# Altium PCB OK335xD V2.4 20160121.PcbDoc (part 3 of 4)
Units mm, origin at the board's own origin, x right, y up, seen from the top; angles counter-clockwise.
Board outline 190 x 130 mm, 4 copper layers (Top Layer, GND, POWER, Bottom Layer); 326 components, 332 nets, 1399 pads, 799 vias.
Unrouted connection lines stored in the file: 413.
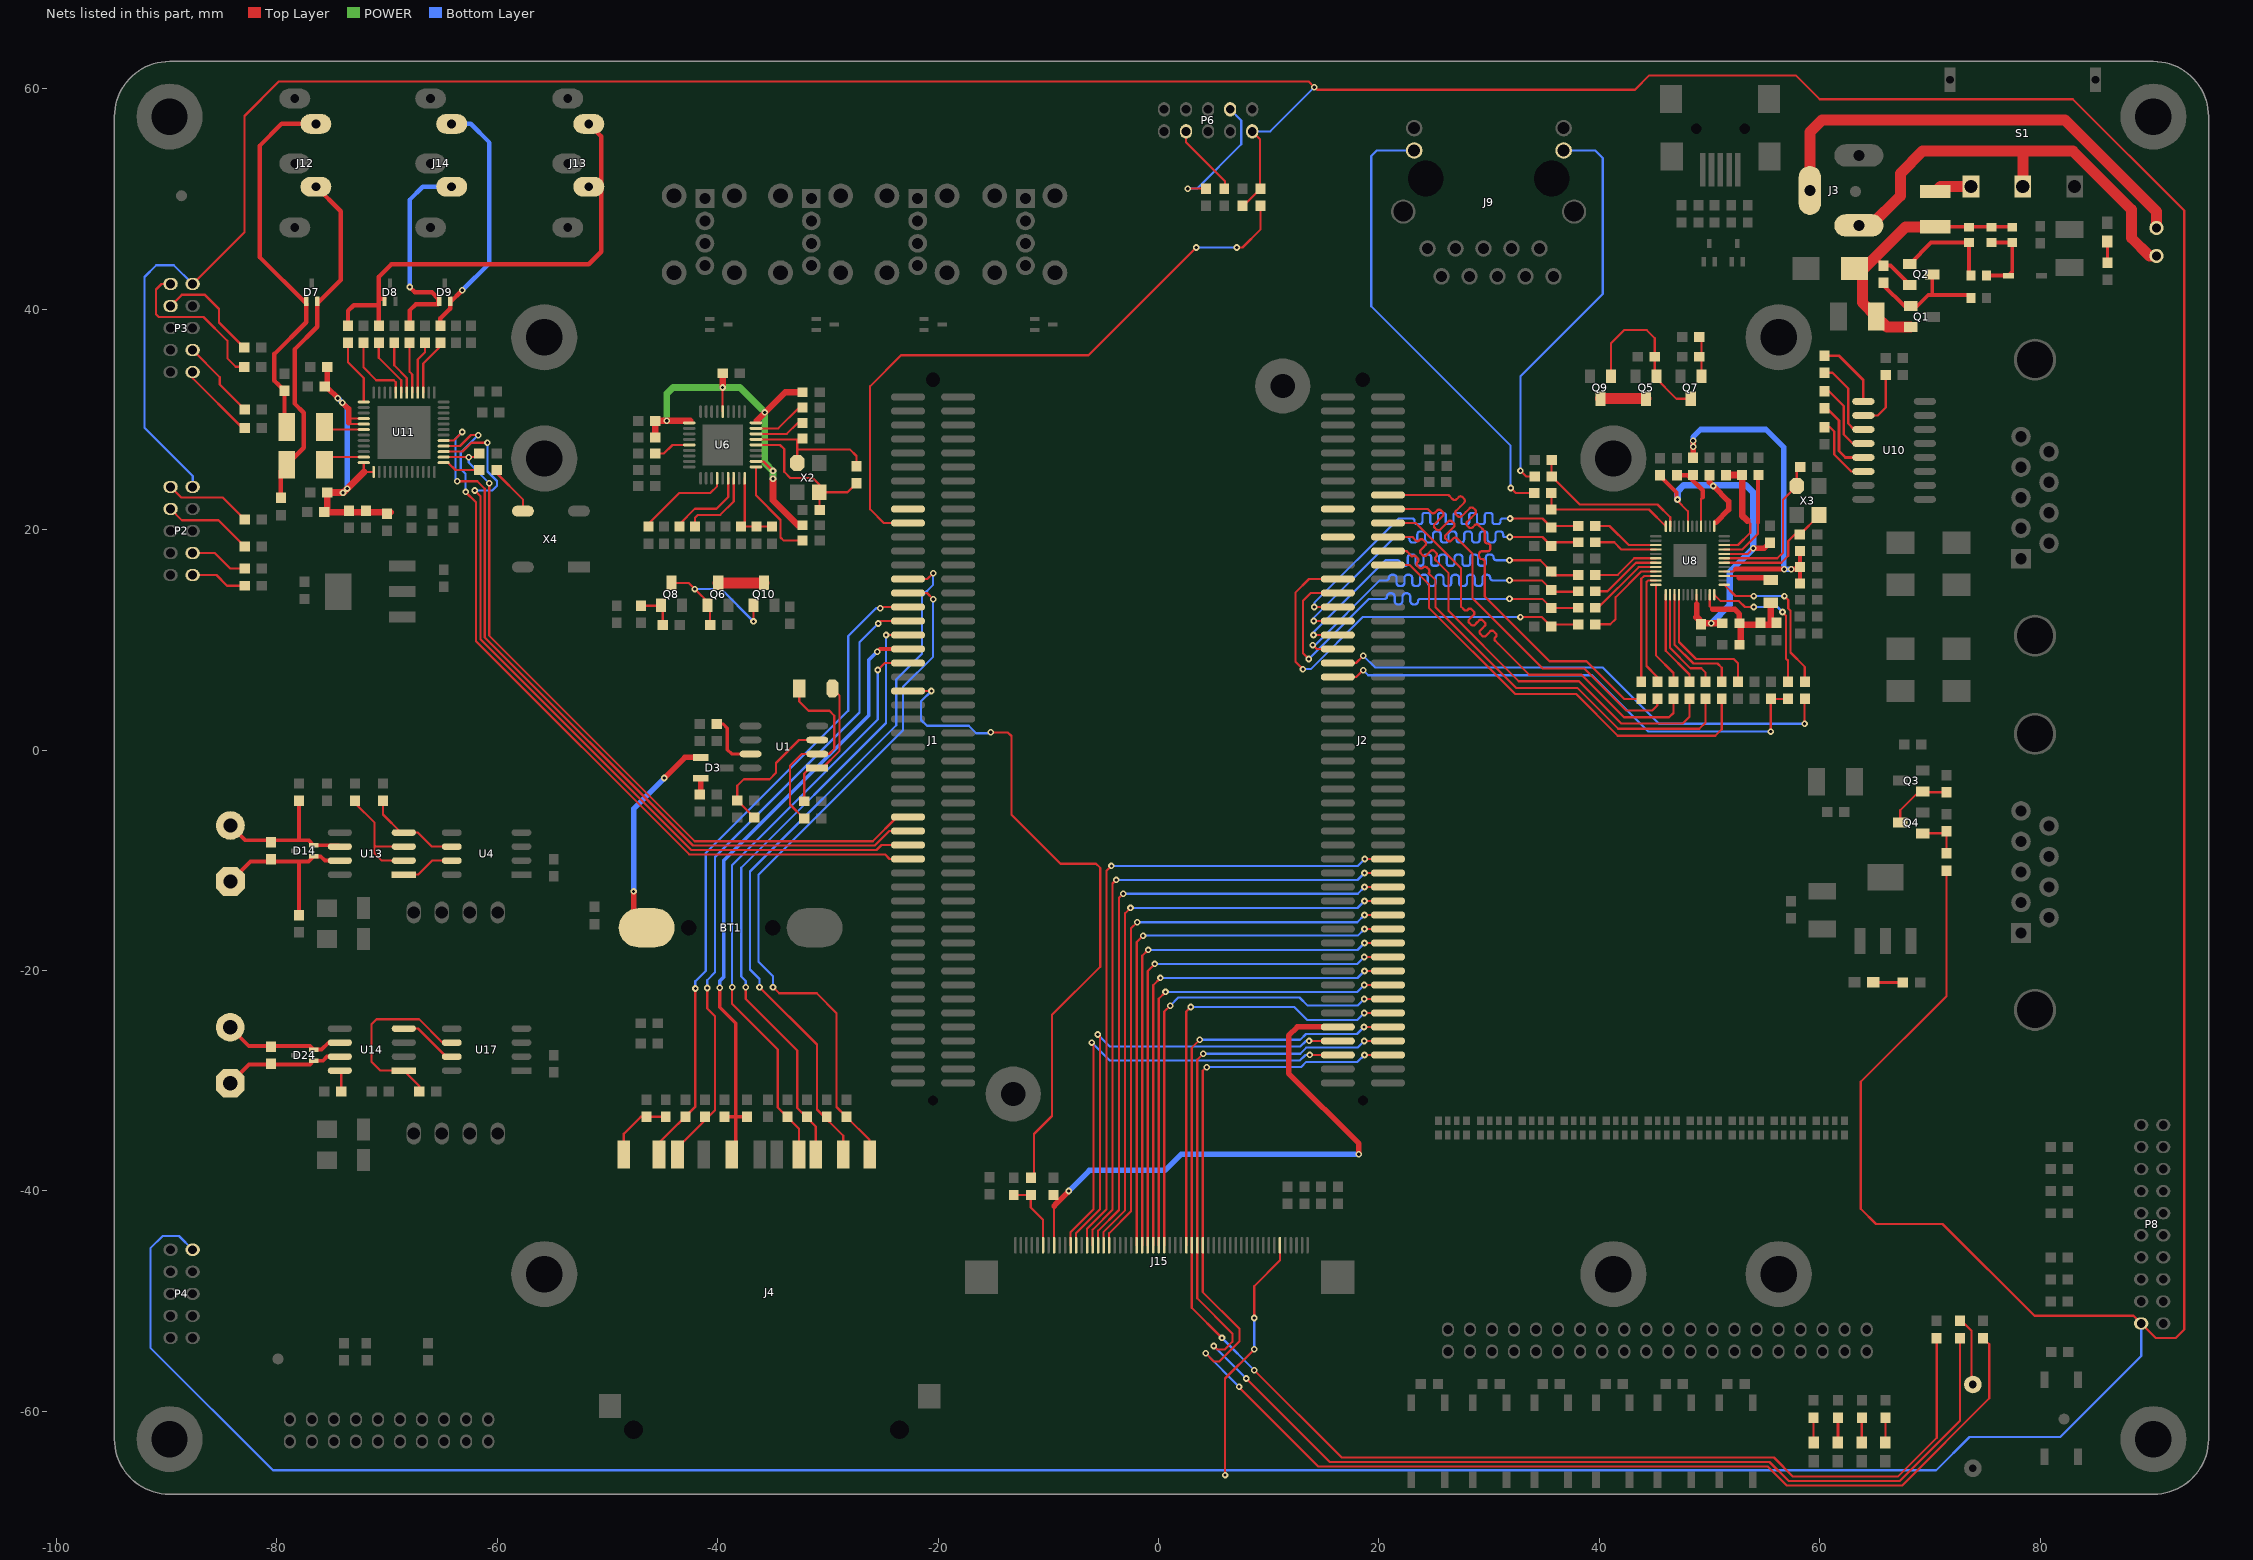
[diagram p5: the nets of this part, all layers, seen from the top]

## Via types
v1: diameter 0.6, hole 0.3, Top Layer to Bottom Layer, tented both sides, 718 vias
v2: diameter 0.66, hole 0.3, Top Layer to Bottom Layer, tented both sides, 34 vias
v3: diameter 0.6, hole 0.35, Top Layer to Bottom Layer, tented both sides, 25 vias
v4: diameter 0.45, hole 0.3, Top Layer to Bottom Layer, tented both sides, 16 vias
v5: diameter 0.4, hole 0.254, Top Layer to Bottom Layer, 4 vias
v6: diameter 0.6, hole 0.3, Top Layer to Bottom Layer, 2 vias

## Nets (pads, with @x,y where several pads share a name; then routed paths per layer and width w, separated by ;. In a path a pad name is that pad's centre, name@x,y a point inside that pad or via, vN(x,y) a via of type N, cw(c..) or ccw(c..) an arc to the next point about the centre after c; other vN are vias at no path point) (continued)
LCD_D1: J2.96 J15.20 R119.1 | length 132.5
  Top Layer w0.2: v1(4.293,-54.737) 5.029,-55.474 5.512,-55.474 7.366,-53.619 7.366,-52.527 4.025,-49.186 J15.20@4.025,-44.925 4.025,-29.097 v1@4.369,-28.753 ; v1(7.315,-57.76) 7.315,-57.81 14.503,-64.999 55.283,-64.999 57.01,-66.726 67.488,-66.726 75.387,-58.826 75.387,-53.912 R119.1@74.828,-53.353 ; v1(18.69,-27.665) J2.96@20.825,-27.665
  Bottom Layer w0.2: v1(4.293,-54.737) v1(7.315,-57.76) ; v1@4.369,-28.753 12.954,-28.753 13.411,-28.296 18.059,-28.296 v1(18.69,-27.665)
  other v1: 4.369,-28.778
LCD_D2: J2.94 J15.21 R116.1 | length 129.5
  Top Layer w0.2: v1(4.074,-27.549) 3.525,-28.098 J15.21@3.525,-44.925 3.525,-49.753 6.706,-52.934 6.706,-53.696 6.02,-54.381 5.334,-54.381 v1(5.029,-54.077) ; v1(7.976,-57.023) 15.551,-64.599 55.449,-64.599 57.176,-66.326 67.253,-66.326 72.72,-60.858 R116.1@72.72,-53.353 ; v1(18.673,-26.395) J2.94@20.825,-26.395
  Bottom Layer w0.2: v1(4.074,-27.549) 12.862,-27.549 13.411,-27 18.068,-27 v1(18.673,-26.395) ; v1(5.029,-54.077) v1(7.976,-57.023)
LCD_D3: J2.92 J15.22 R117.1 | length 126.6
  Top Layer w0.2: v1(3.759,-26.289) 3.025,-27.023 J15.22@3.025,-44.925 3.025,-50.599 v1(5.766,-53.34) ; v1(8.687,-56.261) 16.624,-64.199 55.842,-64.199 57.569,-65.926 67.087,-65.926 70.612,-62.401 R117.1@70.612,-53.353 ; v1(18.648,-25.125) J2.92@20.825,-25.125
  Bottom Layer w0.2: v1(3.759,-26.289) 12.852,-26.289 13.386,-25.756 18.017,-25.756 v1(18.648,-25.125) ; v1(5.766,-53.34) v1(8.687,-56.261)
LCD_D4: J2.90 J15.23 | length 40.4
  Top Layer w0.2: J15.23@2.525,-44.925 2.525,-23.725 v1(2.932,-23.317) ; v1(18.673,-23.855) J2.90@20.825,-23.855
  Bottom Layer w0.2: v1(2.932,-23.317) 12.319,-23.317 13.487,-24.486 18.043,-24.486 v1(18.673,-23.855)
LCD_D5: J2.88 J15.27 | length 42.6
  Top Layer w0.2: J15.27@0.525,-44.925 0.525,-23.732 v1(1.067,-23.19) ; v1(18.673,-22.585) J2.88@20.825,-22.585
  Bottom Layer w0.2: v1(1.067,-23.19) 1.803,-22.454 12.802,-22.454 13.538,-23.19 18.068,-23.19 v1(18.673,-22.585)
LCD_D6: J2.86 J15.28 | length 43.7
  Top Layer w0.2: J15.28@0.025,-44.925 0.025,-22.556 v1(0.635,-21.946) ; v1(18.673,-21.315) J2.86@20.825,-21.315
  Bottom Layer w0.2: v1(0.635,-21.946) 18.043,-21.946 v1(18.673,-21.315)
LCD_D7: J2.84 J15.29 | length 45.4
  Top Layer w0.2: J15.29@-0.475,-44.925 -0.475,-21.328 v1(0.178,-20.676) ; v1(18.69,-20.045) J2.84@20.825,-20.045
  Bottom Layer w0.2: v1(0.178,-20.676) 18.059,-20.676 v1(18.69,-20.045)
LCD_D8: J2.82 J15.30 | length 47.2
  Top Layer w0.2: J15.30@-0.975,-44.925 -0.975,-20.05 v1(-0.33,-19.406) ; v1(18.673,-18.775) J2.82@20.825,-18.775
  Bottom Layer w0.2: v1(-0.33,-19.406) 18.043,-19.406 v1(18.673,-18.775)
LCD_D9: J2.80 J15.31 | length 49
  Top Layer w0.2: J15.31@-1.475,-44.925 -1.475,-18.671 v1(-0.94,-18.136) ; v1(18.699,-17.505) J2.80@20.825,-17.505
  Bottom Layer w0.2: v1(-0.94,-18.136) 18.068,-18.136 v1(18.699,-17.505)
LCD_D10: J2.78 J15.32 | length 50.8
  Top Layer w0.2: J15.32@-1.975,-44.925 -1.975,-17.418 v1(-1.397,-16.84) ; v1(18.699,-16.235) J2.78@20.825,-16.235
  Bottom Layer w0.2: v1(-1.397,-16.84) 18.094,-16.84 v1(18.699,-16.235)
LCD_D11: J2.76 J15.37 | length 53.4
  Top Layer w0.2: J15.37@-4.475,-44.925 -4.475,-43.845 -2.489,-41.859 -2.489,-16.18 v1(-1.93,-15.621) ; v1(18.699,-14.965) J2.76@20.825,-14.965
  Bottom Layer w0.2: v1(-1.93,-15.621) 18.043,-15.621 v1(18.699,-14.965)
LCD_D12: J2.74 J15.38 | length 54.4
  Top Layer w0.2: -4.975,-44.12 -4.975,-43.718 -3.023,-41.765 -3.023,-14.808 v1(-2.54,-14.326) ; v1(18.699,-13.695) J2.74@20.825,-13.695
  Bottom Layer w0.2: v1(-2.54,-14.326) 18.068,-14.326 v1(18.699,-13.695)
LCD_D13: J2.72 J15.39 | length 57.1
  Top Layer w0.2: J15.39@-5.475,-44.925 -5.475,-43.624 -3.581,-41.73 -3.581,-13.411 v1(-3.2,-13.03) ; v1(18.699,-12.425) J2.72@20.825,-12.425
  Bottom Layer w0.2: v1(-3.2,-13.03) 18.094,-13.03 v1(18.699,-12.425)
LCD_D14: J2.70 J15.40 | length 58.9
  Top Layer w0.2: J15.40@-5.975,-44.925 -5.975,-43.53 -4.166,-41.72 -4.166,-12.116 v1(-3.835,-11.786) ; v1(18.699,-11.155) J2.70@20.825,-11.155
  Bottom Layer w0.2: v1(-3.835,-11.786) 18.068,-11.786 v1(18.699,-11.155)
LCD_D15: J2.68 J15.41 | length 60.7
  Top Layer w0.2: J15.41@-6.475,-44.925 -6.475,-43.436 -4.724,-41.685 -4.724,-10.973 v1(-4.267,-10.516) ; v1(18.715,-9.885) J2.68@20.825,-9.885
  Bottom Layer w0.2: v1(-4.267,-10.516) 18.085,-10.516 v1(18.715,-9.885)
LCD_ENBKL: J1.43 R140.1 | length 61.8
  Top Layer w0.2: J1.43@-22.725,5.358 v1(-20.6,5.358) ; v1(-15.215,1.6) -13.665,1.6 -13.335,1.27 -13.335,-5.873 -8.896,-10.312 -5.664,-10.312 -5.283,-10.693 -5.283,-19.66 -9.652,-24.028 -9.652,-33.198 -11.29,-34.835 R140.1@-11.29,-38.827
  Bottom Layer w0.2: v1(-20.6,5.358) -21.539,4.42 -21.539,2.73 -21.006,2.197 -17.209,2.197 -16.535,1.524 -15.291,1.524 v1(-15.215,1.6)
LCD_HSYNC: J2.93 J15.43 | length 42.5
  Top Layer w0.2: J15.43@-7.475,-44.925 -7.475,-43.842 -5.309,-41.676 -5.309,-26.01 v1(-5.512,-25.806) ; v1(13.666,-26.392) J2.93@16.275,-26.392
  Bottom Layer w0.2: v1(-5.512,-25.806) -4.42,-26.899 12.878,-26.899 13.385,-26.392 v1(13.666,-26.392)
LCD_PCLK: C4.2 J2.91 J15.47 | length 51.6
  Top Layer w0.2: J15.47@-9.475,-44.925 -9.475,-41.402 ; -9.474,-41.097 -9.22,-41.097
  Top Layer w0.5: -9.475,-41.402 -9.475,-41.352 -9.22,-41.097 v1(-8.128,-40.005) ; J2.91@16.275,-25.122 12.597,-25.122 11.811,-25.908 11.811,-29.337 18.186,-35.712 v1(18.186,-36.678)
  Bottom Layer w0.5: v1(-8.128,-40.005) -6.265,-38.142 0.582,-38.142 2.046,-36.678 v1(18.186,-36.678)
LCD_VSYNC: J2.95 J15.44 | length 42.5
  Top Layer w0.2: J15.44@-7.975,-44.925 -7.975,-43.748 -5.893,-41.666 -5.893,-26.695 v1(-6.045,-26.543) ; v1(13.74,-27.662) J2.95@16.275,-27.662
  Bottom Layer w0.2: v1(-6.045,-26.543) -4.42,-28.169 12.827,-28.169 13.334,-27.662 v1(13.74,-27.662)
MAX485-RXD: U4.7 U13.1 | length 4.9
  Top Layer w0.2: U13.1@-68.474,-11.303 -67.183,-11.303 -65.913,-10.033 U4.7@-64.122,-10.033
MAX485-TXD: R112.2 U4.6 U13.4 | length 8.7
  Top Layer w0.2: R112.2@-70.358,-4.585 -70.358,-5.842 -68.707,-7.493 U13.4@-68.474,-7.493 -67.183,-7.493 -65.913,-8.763 U4.6@-64.122,-8.763
MCASP0_ACLKR: J1.61 R97.1 U11.38 | length 67
  Top Layer w0.2: U11.38@-64.853,26.579 v1(-62.586,26.579) -61.953,26.579 R97.1@-61.608,26.924 ; v1(-60.706,24.206) -60.719,24.194 -60.719,10.38 -42.071,-8.268 -25.921,-8.268 -23.725,-6.072 J1.61@-22.725,-6.072
  Bottom Layer w0.2: v1(-62.586,26.579) -62.586,26.086 v1(-60.706,24.206)
MCASP0_AHCLKX: J1.63 U11.41 | length 69.8
  Top Layer w0.2: U11.41@-64.853,28.079 -63.945,28.079 v1(-63.17,28.854) ; v1(-63.627,24.384) -61.798,24.384 -61.119,23.704 -61.119,10.214 -42.237,-8.668 -25.755,-8.668 -24.429,-7.342 J1.63@-22.725,-7.342
  Bottom Layer w0.2: v1(-63.627,24.384) -63.779,24.536 -63.779,28.245 v1(-63.17,28.854)
MCASP0_AXR1: J1.67 U11.40 | length 70.8
  Top Layer w0.2: U11.40@-64.853,27.579 -63.378,27.579 -62.382,28.575 v1(-61.722,28.575) ; v1(-62.865,23.419) -61.919,22.472 -61.919,9.883 -42.568,-9.468 -24.817,-9.468 -24.403,-9.882 J1.67@-22.725,-9.882
  Bottom Layer w0.2: v1(-62.865,23.419) -62.865,25.07 -63.297,25.502 -63.297,27 v1(-61.722,28.575)
MCASP0_FSR: J1.65 U11.39 | length 71.4
  Top Layer w0.2: U11.39@-64.853,27.079 -63.142,27.079 -62.332,27.889 v1(-60.884,27.889) ; v1(-62.027,23.546) -61.519,23.038 -61.519,10.049 -42.402,-9.068 -25.589,-9.068 -25.133,-8.612 J1.65@-22.725,-8.612
  Bottom Layer w0.2: v1(-62.027,23.546) -60.452,23.546 -60.02,23.978 -60.02,24.409 -60.884,25.273 v1(-60.884,27.889)
MCP2551-RXD: U14.4 U17.7 | length 5.4
  Top Layer w0.2: U14.4@-68.474,-25.273 -67.183,-25.273 -64.643,-27.813 U17.7@-64.122,-27.813
MCP2551-TXD: R153.2 U14.1 U17.6 | length 17.5
  Top Layer w0.2: R153.2@-67.069,-30.988 -67.069,-30.488 U14.1@-68.474,-29.083 -70.612,-29.083 -71.399,-28.296 -71.399,-24.892 -70.942,-24.435 -67.081,-24.435 -64.973,-26.543 U17.6@-64.122,-26.543
MMC0_CD: J1.39 J4.11 R27.2 | length 55
  Top Layer w0.2: v1(-38.684,-21.514) -38.684,-23.038 -34.544,-27.178 -34.544,-32.436 -32.612,-34.368 J4.11@-32.612,-36.703 ; v1(-25.476,7.264) -24.842,7.898 J1.39@-22.725,7.898
  Bottom Layer w0.2: v1(-38.684,-21.514) -38.684,-10.439 -25.476,2.769 v1(-25.476,7.264)
MMC0_CLK: C14.1 J1.37 J4.5 R23.2 | length 56.9
  Top Layer w0.35: v1(-39.802,-21.565) -39.802,-23.343 -38.354,-24.79 J4.5@-38.354,-36.476 ; C14.1@-39.37,-33.274 R23.2@-37.592,-33.274 ; J4.5@-38.708,-36.703 J4.5@-38.481,-36.476 ; v1(-25.527,8.915) -25.274,9.168 J1.37@-22.725,9.168
  Bottom Layer w0.35: v1(-39.802,-21.565) -39.802,-20.955 -39.446,-20.599 -39.446,-10.024 -26.289,3.133 -26.289,8.153 v1(-25.527,8.915)
MMC0_CMD: J1.35 J4.2 R22.2 | length 57.4
  Top Layer w0.2: v1(-37.44,-21.514) -37.44,-22.581 -32.766,-27.254 -32.766,-32.487 -31.088,-34.165 J4.2@-31.088,-36.703 ; v1(-24.714,10.439) -24.713,10.438 J1.35@-22.725,10.438
  Bottom Layer w0.2: v1(-37.44,-21.514) -37.44,-20.955 -37.846,-20.549 -37.846,-10.687 -24.714,2.445 v1(-24.714,10.439)
MMC0_D0: J1.33 J4.7 R24.2 | length 59.1
  Top Layer w0.2: J4.7@-43.638,-36.704 -43.638,-36.095 -40.234,-32.69 -40.234,-24.155 -40.945,-23.444 v1(-40.945,-21.59) ; v1(-25.425,11.481) -25.198,11.708 J1.33@-22.725,11.708
  Bottom Layer w0.2: v1(-40.945,-21.59) -40.945,-20.879 -40.234,-20.168 -40.234,-9.698 -27.127,3.409 -27.127,9.779 v1(-25.425,11.481)
MMC0_D1: J1.31 J4.8 R25.2 | length 60.7
  Top Layer w0.22: J4.8@-45.312,-36.703 -45.312,-35.635 -42.012,-32.334 -42.012,-23.969 v1(-42.012,-21.641) ; v1(-25.248,12.878) -25.147,12.978 J1.31@-22.725,12.978
  Bottom Layer w0.22: v1(-42.012,-21.641) -42.012,-20.98 -41.072,-20.041 -41.072,-9.35 -28.143,3.578 -28.143,10.338 -25.603,12.878 v1(-25.248,12.878)
MMC0_D2: J1.29 J4.9 R20.2 | length 65.6
  Top Layer w0.2: v1(-34.976,-21.514) -34.417,-22.073 -31.013,-22.073 -29.21,-23.876 -29.21,-32.385 R20.2@-28.321,-33.274 -26.208,-35.387 J4.9@-26.208,-36.703 ; J1.29@-22.725,14.248 -21.005,14.248 v1(-20.447,13.691)
  Bottom Layer w0.2: v1(-34.976,-21.514) -34.976,-20.523 -36.297,-19.202 -36.297,-11.328 -23.19,1.778 -23.19,5.715 -20.447,8.458 v1(-20.447,13.691)
MMC0_D3: J1.27 J4.1 R21.2 | length 65.6
  Top Layer w0.2: v1(-36.195,-21.514) -30.988,-26.721 -30.988,-32.614 -28.598,-35.004 J4.1@-28.598,-36.703 ; J1.27@-22.725,15.518 -20.981,15.518 v1(-20.447,16.053)
  Bottom Layer w0.2: v1(-36.195,-21.514) -36.195,-20.777 -37.059,-19.914 -37.059,-11.013 -23.8,2.246 -23.8,6.401 -21.463,8.738 -21.463,13.97 -20.447,14.986 v1(-20.447,16.053)
NetBT1_1: BT1.1 D3.1 | length 19.3
  Top Layer w0.5: v1(-47.625,-12.827) -47.625,-14.935 BT1.1@-46.431,-16.129 ; v1(-44.831,-2.54) -42.967,-0.676 D3.1@-41.536,-0.676
  Bottom Layer w0.5: v1(-47.625,-12.827) -47.625,-5.334 v1(-44.831,-2.54)
NetC8_1: C8.1 C21.1 D5.2 F1.2 Q1.2 Q2.2 R15.1 R16.1 R33.1 | length 27.7
  Top Layer w0.35: 65.024,44.704 65.773,43.955 C8.1@65.786,43.955 66.421,43.955 Q2.2@68.174,42.202 ; F1.2@70.485,47.473 77.433,47.473 R16.1@77.47,47.436
  Top Layer w1: Q1.2@68.25,38.367 66.1,38.367 C21.1@65.122,39.345 63.881,40.586 63.881,43.561 65.024,44.704 67.793,47.473 F1.2@70.485,47.473
NetC8_2: C8.2 Q1.1 Q2.3 R58.1 | length 11.2
  Top Layer w0.35: C8.2@65.786,42.405 65.786,42.164 67.678,40.272 Q1.1@68.25,40.272 68.847,40.272 69.85,41.275 73.468,41.275 R58.1@73.722,41.021 ; 70.206,41.377 Q2.3@70.206,43.142
NetC17_1: C17.1 R37.1 R42.2 U6.27 | length 6.8
  Top Layer w0.2: C17.1@-37.871,20.282 R37.1@-36.474,20.282 R42.2@-35.077,20.282 ; C17.1@-37.542,20.611 U6.27@-37.542,24.659
NetC19_2: C19.2 R62.2 U6.33 X2.1 | length 12.8
  Top Layer w0.2: U6.33@-36.517,28.184 C19.2@-32.382,28.184 ; X2.1@-32.775,26.039 -32.775,27.28 ; -32.775,28.127 -32.775,27.28 ; R62.2@-27.407,25.743 -27.407,26.67 -28.016,27.28 -32.775,27.28
NetC20_2: C20.2 R62.1 U6.32 X2.3 | length 14.4
  Top Layer w0.2: U6.32@-36.517,27.684 -34.339,27.684 -33.96,27.305 -33.96,25.248 -33.401,24.689 -31.369,24.689 -30.746,24.066 X2.3@-30.746,23.389 ; X2.3@-30.775,23.389 X2.3@-30.746,23.389 ; C20.2@-30.746,21.793 X2.3@-30.746,23.389 ; R62.1@-27.407,24.193 -28.211,23.389 X2.3@-30.746,23.389
NetC27_1: C27.1 U6.34 | length 4.6
  Top Layer w0.2: U6.34@-36.517,28.684 -33.724,28.684 -32.741,29.667 C27.1@-32.296,29.667
NetC29_1: C29.1 U6.14 | length 3.4
  Top Layer w0.2: C29.1@-45.656,26.899 -44.882,26.899 -44.096,27.684 U6.14@-42.567,27.684
NetC30_1: C30.1 C31.1 C32.1 C33.1 L14.2 U6.5 U6.10 U6.29 U6.36 | length 39.5
  Top Layer w0.2: v1(-39.548,32.893) -39.542,32.888 U6.5@-39.542,30.709 ; U6.29@-36.517,26.184 -35.836,26.184 v1(-34.976,25.324)
  Top Layer w0.6: L14.2@-45.656,28.372 C30.1@-45.656,29.87 v1(-44.628,29.87) -42.494,29.87 ; v1(-39.548,32.893) C31.1@-39.548,33.998 ; -36.449,29.87 -33.858,32.461 C32.1@-32.296,32.461 ; v1(-34.976,24.613) -34.976,22.657 -32.715,20.396 C33.1@-32.296,20.396
  POWER w0.6: v1(-44.628,29.87) -44.628,32.309 -44.044,32.893 v1(-39.548,32.893) -37.973,32.893 v1(-35.712,30.632) -35.712,26.034 -34.976,25.297 v1(-34.976,24.613)
NetC34_2: C34.2 C35.2 C36.2 L5.2 L6.1 U8.47 | length 11.4
  Top Layer w0.2: U8.47@50.025,14.097 50.025,13.043 50.292,12.776
  Top Layer w0.5: 50.292,12.776 52.273,12.776 52.718,12.331 L6.1@52.718,11.506
  Top Layer w0.6: C36.2@52.843,9.55 52.843,11.381 55.55,11.381 L5.2@55.55,13.377
NetC37_2: C37.2 U8.7 X3.1 | length 14
  Top Layer w0.2: U8.7@51.336,17.396 56.156,17.396 56.667,17.907 56.667,22.707 X3.1@57.916,23.956 57.916,25.366 C37.2@58.229,25.679
NetC38_2: C38.2 U8.6 X3.3 | length 11.2
  Top Layer w0.2: U8.6@51.336,16.996 56.518,16.996 57.15,17.628 57.15,18.974 57.734,19.558 C38.2@58.204,19.558 59.916,21.27 X3.3@59.916,21.306
NetC39_2: C39.2 C40.2 C41.2 C42.2 L6.2 U8.8 U8.13 U8.19 U8.44 | length 42.3
  Top Layer w0.2: 47.015,23.139 47.015,22.682 48.035,21.663 U8.19@48.035,20.297 ; 48.825,13.239 U8.44@48.825,14.097 ; U8.8@51.336,17.796 53.457,17.796 v1(53.975,18.313)
  Top Layer w0.35: C41.2@45.516,24.943 45.516,24.868 47.015,23.368 v1@47.015,22.733
  Top Layer w0.5: 48.819,12.065 48.819,13.233 48.825,13.239 ; C40.2@49.986,24.949 49.986,24.309 v1(50.343,23.952) 51.74,22.555 51.74,21.805 50.585,20.65 ; v1(53.975,18.313) 54.979,18.313 C42.2@55.474,18.808
  Top Layer w0.6: 48.819,12.065 49.378,11.506 v1(50.165,11.506) L6.2@51.168,11.506
  Bottom Layer w0.6: v1(47.092,22.733) 47.092,23.47 47.655,24.033 53.285,24.033 53.975,23.343 v1(53.975,18.313) 51.841,16.18 51.841,13.183 v1(50.165,11.506)
NetC43_2: C43.2 C44.2 L7.2 R86.1 U8.4 | length 31.9
  Top Layer w0.2: U8.4@51.336,16.196 52.137,16.196 52.349,16.408
  Top Layer w0.4: R86.1@58.21,15.116 C43.2@58.21,16.597 C44.2@58.21,18.078
  Top Layer w0.45: 52.349,16.408 v1(56.769,16.408) ; v1(57.404,16.408) C43.2@58.021,16.408
  Top Layer w0.5: 48.514,27.026 v1(48.514,27.508) v3(48.514,28.067)
  Bottom Layer w0.5: v1(48.514,27.508) 48.514,28.397 49.2,29.083 55.118,29.083 56.744,27.457 56.744,16.408 v1(56.769,16.408) v1(57.404,16.408)
NetC45_2: C45.2 L7.1 U8.16 | length 6.2
  Top Layer w0.2: U8.16@49.235,20.297 49.235,22.793 49.378,22.936
  Top Layer w0.4: C45.2@47.041,24.943 48.006,24.943 49.378,23.571 49.378,22.936
NetC47_2: C47.2 R87.2 U8.10 | length 9.8
  Top Layer w0.2: U8.10@51.336,18.596 52.581,18.596 53.696,19.71 53.696,20.549 53.416,20.828
  Top Layer w0.6: C47.2@51.486,24.949 51.492,24.955 R87.2@52.959,24.955 52.959,21.285 53.416,20.828
NetC49_2: C49.2 U10.2 | length 5.3
  Top Layer w0.2: U10.2@63.956,30.36 65.259,30.36 65.981,31.082 C49.2@65.981,34.03
NetC51_1: C51.1 U10.6 | length 6.4
  Top Layer w0.2: C51.1@60.431,29.301 60.92,29.301 61.322,28.898 61.322,26.816 62.858,25.28 U10.6@63.956,25.28
NetC52_1: C52.1 U10.4 | length 7
  Top Layer w0.2: C52.1@60.431,32.551 60.845,32.551 62.179,31.217 62.179,28.638 62.997,27.82 U10.4@63.956,27.82
NetC52_2: C52.2 U10.5 | length 7
  Top Layer w0.25: C52.2@60.431,31.001 60.642,31.001 61.747,29.896 61.747,27.127 62.325,26.55 U10.5@63.956,26.55
NetC53_1: C53.1 U11.23 | length 3.9
  Top Layer w0.2: C53.1@-75.67,25.883 -74.974,26.579 U11.23@-72.103,26.579
NetC53_2: C53.2 D7.2 J12.3 R101.2 | length 32.1
  Top Layer w0.4: R101.2@-79.629,22.873 -79.629,25.353 C53.2@-79.099,25.883 -77.546,27.436 -77.546,30.607 -78.384,31.445 -78.384,36.347 -76.335,38.397 -76.335,40.505 -74.193,42.647 -74.193,48.883 J12.3@-76.449,51.138
NetC54_1: C54.1 U11.18 | length 3.7
  Top Layer w0.2: C54.1@-75.67,29.312 -75.437,29.079 U11.18@-72.103,29.079
NetC54_2: C54.2 D7.1 J12.2 R102.2 | length 34.9
  Top Layer w0.4: C54.2@-79.099,29.312 -79.099,29.849 -79.299,30.048 R102.2@-79.299,32.601 -79.924,33.226 -79.935,33.226 -80.199,33.489 -80.199,33.501 -80.213,33.515 -80.213,35.941 -77.335,38.819 -77.335,40.505 -81.559,44.729 -81.559,54.813 -79.534,56.838 J12.2@-76.449,56.838
NetC55_1: C55.1 U11.7 | length 5.4
  Top Layer w0.2: C55.1@-70.739,36.944 -70.739,35.585 -68.703,33.549 U11.7@-68.703,32.429
NetC55_2: C55.2 D8.1 J13.2 J13.3 R103.1 | length 42.5
  Top Layer w0.4: R103.1@-73.533,38.494 -73.533,39.853 -73.025,40.361 -70.739,40.361 ; C55.2@-70.739,38.494 -70.739,40.361 ; -70.727,40.958 D8.1@-70.223,40.958 ; J13.2@-51.684,56.813 -50.546,55.675 -50.546,45.212 -51.689,44.069 -69.596,44.069 -70.739,42.926 -70.739,40.361
NetC56_1: C56.1 U11.8 | length 6.7
  Top Layer w0.2: C56.1@-72.136,36.944 -72.136,34.722 -70.968,33.553 -69.393,33.553 -69.203,33.364 U11.8@-69.203,32.429
NetC57_1: C57.1 U11.3 | length 5.2
  Top Layer w0.2: U11.3@-66.703,32.429 -66.703,35.075 -65.151,36.627 C57.1@-65.151,36.944
NetC57_2: C57.2 D9.2 J14.2 | length 22.2
  Top Layer w0.4: C57.2@-65.151,38.494 -65.151,39.167 -64.27,40.048 -64.27,40.607 v1(-63.157,41.72)
  Bottom Layer w0.4: J14.2@-63.749,56.813 -62.401,56.813 -60.706,55.118 -60.706,44.171 v1(-63.157,41.72)
NetC58_1: C58.1 U11.4 | length 4.8
  Top Layer w0.2: U11.4@-67.203,32.429 -67.203,35.438 -66.548,36.093 C58.1@-66.548,36.944
NetC59_1: C59.1 U11.5 | length 4.6
  Top Layer w0.2: C59.1@-67.945,36.944 -67.945,34.315 -67.703,34.073 U11.5@-67.703,32.429
NetC59_2: C59.2 D9.1 J14.3 | length 20.4
  Top Layer w0.4: C59.2@-67.945,38.494 -67.945,39.878 -67.374,40.449 -65.342,40.449 -65.342,40.958 -65.913,41.529 -67.462,41.529 v1(-67.945,42.012)
  Bottom Layer w0.4: v1(-67.945,42.012) -67.945,49.911 -66.743,51.113 J14.3@-63.749,51.113
NetC60_1: C60.1 U11.6 | length 5
  Top Layer w0.2: C60.1@-69.342,36.944 -69.342,34.9 -68.203,33.761 U11.6@-68.203,32.429
NetC61_1: C61.1 C62.1 C63.1 C64.1 C65.1 C66.1 L8.1 U11.16 U11.17 U11.24 U11.25 | length 30.7
  Top Layer w0.2: -73.482,29.579 U11.17@-72.103,29.579 ; -73.482,30.079 U11.16@-72.103,30.079 ; -72.103,25.229 U11.24@-72.103,26.079 ; -72.085,25.229 U11.25@-71.203,25.229
  Top Layer w0.5: C62.1@-75.4,34.773 -75.4,32.866 v1(-74.462,31.928) ; v1(-74.041,31.507) -73.482,30.948 -73.482,30.079 -73.482,29.69
  Top Layer w0.6: C63.1@-75.554,21.576 C65.1@-69.672,21.576 ; C63.1@-75.554,21.59 -75.425,21.719 C64.1@-75.425,23.368 -73.946,23.368 -72.085,25.229
  Bottom Layer w0.5: v1(-74.462,31.928) v1(-74.041,31.507) -73.609,31.075 v1(-73.609,23.724) v1(-73.99,23.343)
NetC75_1: C75.1 U10.1 | length 6.4
  Top Layer w0.25: C75.1@60.427,35.776 61.734,35.776 63.956,33.554 U10.1@63.956,31.63
NetC75_2: C75.2 U10.3 | length 7.5
  Top Layer w0.2: C75.2@60.427,34.226 61.151,34.226 62.579,32.798 62.579,29.623 63.112,29.09 U10.3@63.956,29.09
NetC76_2: C76.2 U1.2 X1.2 | length 17.9
  Top Layer w0.2: X1.2@-32.59,5.588 -32.59,4.396 -31.75,3.556 -29.845,3.556 -29.413,3.124 -29.413,0.127 -29.896,-0.356 -32.36,-0.356 -33.426,-1.422 -33.426,-4.941 C76.2@-32.144,-6.223
NetC77_2: C77.2 U1.1 X1.1 | length 12.5
  Top Layer w0.2: C77.2@-32.144,-4.648 -32.144,-2.121 -31.648,-1.626 -30.48,-1.626 -28.931,-0.076 -28.931,4.929 X1.1@-29.59,5.588
NetD3_2: D3.2 R8.1 | length 1.4
  Top Layer w0.5: R8.1@-41.536,-3.956 D3.2@-41.536,-2.576
NetD6_2: D6.2 R15.2 R16.2 R47.1 | length 7
  Top Layer w0.35: R47.1@75.122,43.053 D6.2@77.113,43.053 77.47,43.41 R16.2@77.47,46.036 R15.2@75.565,46.036
NetD14_1: D14.1 P5.1 R34.2 R39.2 U13.7 | length 15.9
  Top Layer w0.35: P5.1@-84.201,-11.923 -82.387,-10.109 -77.978,-10.109 ; R34.2@-77.978,-14.973 -77.978,-10.109 ; U13.7@-74.274,-10.033 -75.616,-10.033 -76.005,-9.644 D14.1@-76.645,-9.644 -77.11,-10.109 -77.978,-10.109
NetD14_2: D14.2 P5.2 R39.1 R105.2 U13.6 | length 14.3
  Top Layer w0.35: P5.2@-84.201,-6.843 -82.866,-8.179 -77.11,-8.179 D14.2@-76.645,-8.644 -74.393,-8.644 U13.6@-74.274,-8.763 ; -77.978,-8.153 R105.2@-77.978,-4.585
NetD24_1: D24.1 P7.1 R50.1 U14.7 | length 11
  Top Layer w0.35: P7.1@-84.226,-30.237 -82.514,-28.524 -76.983,-28.524 D24.1@-76.645,-28.186 -75.811,-28.186 -75.438,-27.813 U14.7@-74.274,-27.813
NetD24_2: D24.2 P7.2 R50.2 U14.6 | length 11.1
  Top Layer w0.35: P7.2@-84.226,-25.157 -82.535,-26.848 -76.983,-26.848 D24.2@-76.645,-27.186 -75.929,-27.186 -75.286,-26.543 U14.6@-74.274,-26.543
NetF1_1: F1.1 S1.3 | length 3.4
  Top Layer w1: F1.1@70.485,50.673 70.937,51.125 S1.3@73.725,51.125
NetJ1_19: J1.19 R261.2 | length 58.6
  Top Layer w0.2: J1.19@-22.725,20.598 -24.916,20.598 -26.162,21.844 -26.162,33.02 -23.368,35.814 -6.35,35.814 v1(3.429,45.593) ; v1(7.112,45.593) 7.62,45.593 9.271,47.244 R261.2@9.271,49.39
  Bottom Layer w0.2: v1(3.429,45.593) v1(7.112,45.593)
NetJ3_1: J3.1 P10.1 S1.2 | length 39.6
  Top Layer w1: J3.1@63.55,47.6 64.618,47.6 67.31,50.292 67.31,52.324 69.342,54.356 82.956,54.356 88.265,49.047 88.265,46.482 89.916,44.831 P10.1@90.551,44.831 ; S1.2@78.425,51.125 78.425,54.295
NetJ3_3: J3.3 P10.2 | length 42.1
  Top Layer w1: J3.3@59.105,50.775 59.105,56.057 60.198,57.15 82.245,57.15 90.551,48.844 P10.2@90.551,47.371
NetJ4_10: J4.10 R26.2 R30.1 | length 6.3
  Top Layer w0.22: J4.10@-48.514,-36.703 -48.514,-34.823 -46.965,-33.274 R26.2@-44.704,-33.274
NetJ9_D1: J9.D1 R82.2 | length 36.8
  Top Layer w0.2: v1(32.842,25.349) 33.376,24.816 R82.2@34.125,24.816
  Bottom Layer w0.2: v1(32.842,25.349) 32.842,33.909 40.31,41.377 40.31,53.721 39.634,54.397 J9.D1@36.76,54.397
NetJ9_D3: J9.D3 R83.2 | length 41.8
  Top Layer w0.2: v1(31.953,23.774) 32.41,23.317 R83.2@34.099,23.317
  Bottom Layer w0.2: J9.D3@23.2,54.397 19.802,54.397 19.304,53.899 19.304,40.259 31.953,27.61 v1(31.953,23.774)
NetJ15_49: J15.49 R140.2 R141.2 | length 6.4
  Top Layer w0.2: R141.2@-12.965,-40.377 -11.582,-40.377 -11.582,-41.504 -10.475,-42.611 J15.49@-10.475,-44.925
NetL5_1: L5.1 U8.3 | length 4.4
  Top Layer w0.2: U8.3@51.336,15.796 52.505,15.796 52.68,15.621
  Top Layer w0.5: 52.68,15.621 55.356,15.621 L5.1@55.55,15.427
NetLED1_1: LED1.1 R3.1 | length 1.9
  Top Layer w0.3: R3.1@86.106,44.209 LED1.1@86.106,46.14
NetLED2_1: LED2.1 R14.1 | length 2.7
  Top Layer w0.25: LED2.1@64.858,-21.082 R14.1@67.551,-21.082
NetLED4_2: LED4.2 R135.1 | length 2.3
  Top Layer w0.2: LED4.2@59.43,-62.821 R135.1@59.43,-60.562
NetLED5_2: LED5.2 R136.1 | length 2.3
  Top Layer w0.25: LED5.2@61.648,-62.826 R136.1@61.648,-60.562
NetLED6_2: LED6.2 R137.1 | length 2.3
  Top Layer w0.2: LED6.2@63.816,-62.818 R137.1@63.816,-60.562
NetLED7_2: LED7.2 R138.1 | length 2.3
  Top Layer w0.2: LED7.2@65.958,-62.822 R138.1@65.958,-60.562
NetP2_1: P2.1 R28.1 | length 5.1
  Top Layer w0.2: P2.1@-87.63,15.875 -85.471,15.875 -84.506,14.91 R28.1@-82.893,14.91
NetP2_3: P2.3 R49.1 | length 5.3
  Top Layer w0.2: P2.3@-87.63,17.875 -85.617,17.875 -84.201,16.459 R49.1@-82.893,16.459
NetP2_8: P2.8 R79.2 | length 8.1
  Top Layer w0.2: P2.8@-89.63,21.875 -88.609,20.853 -85.281,20.853 R79.2@-82.893,18.466
NetP2_10: P2.10 R84.2 | length 7.9
  Top Layer w0.2: P2.10@-89.63,23.875 -88.666,22.911 -84.9,22.911 R84.2@-82.919,20.93
NetP3_1: P3.1 R156.1 | length 7.1
  Top Layer w0.2: P3.1@-87.63,34.29 -87.63,33.731 -83.109,29.21 R156.1@-82.919,29.21
NetP3_3: P3.3 R157.1 | length 7.3
  Top Layer w0.2: P3.3@-87.63,36.29 -85.166,33.826 -85.166,33.159 R157.1@-82.919,30.912
NetP3_8: P3.8 R143.2 | length 9.8
  Top Layer w0.22: P3.8@-89.63,40.29 -88.62,41.3 -86.512,41.3 -85.242,40.03 -85.242,38.798 R143.2@-82.969,36.525
NetP3_10: P3.10 R142.2 | length 14.7
  Top Layer w0.2: P3.10@-89.63,42.29 -90.451,42.29 -90.957,41.783 -90.957,39.548 -90.703,39.294 -86.639,39.294 -84.48,37.135 -84.48,35.535 -83.718,34.773 R142.2@-82.944,34.773
NetP6_3: P6.3 R147.2 | length 6.7
  Top Layer w0.2: P6.3@2.508,56.134 2.508,55.15 6.045,51.613 R147.2@6.045,50.94
NetP6_8: P6.8 R148.1 | length 11.8
  Top Layer w0.2: v1(2.654,50.94) R148.1@4.318,50.94
  Bottom Layer w0.2: v1(2.654,50.94) 3.493,50.94 7.518,54.966 7.518,57.124 P6.8@6.508,58.134
NetQ2_1: Q2.1 R33.2 R47.2 | length 9.2
  Top Layer w0.35: Q2.1@68.174,44.107 70.102,46.036 R33.2@73.533,46.036 73.533,43.242 R47.2@73.722,43.053
NetQ3_1: Q3.1 Q4.3 R59.1 | length 6
  Top Layer w0.2: Q4.3@67.31,-6.591 67.31,-5.461 68.948,-3.823 R59.1@71.501,-3.823
NetQ4_1: Q4.1 R61.1 R106.1 | length 4.2
  Top Layer w0.2: Q4.1@69.342,-7.556 71.323,-7.556 R106.1@71.501,-7.379 R61.1@71.501,-9.385
NetQ5_1: Q5.1 Q7.3 Q9.1 R107.1 | length 15.4
  Top Layer w0.2: Q9.1@41.059,33.909 41.059,36.919 42.24,38.1 44.298,38.1 45.022,37.376 R107.1@45.022,35.687 45.022,33.845 46.99,31.877 Q7.3@48.298,31.877
NetQ5_3: Q5.3 Q9.3 | length 4.1
  Top Layer w1: Q9.3@40.094,31.877 Q5.3@44.234,31.877
NetQ6_1: Q6.1 Q8.3 Q10.1 R108.1 | length 14.2
  Top Layer w0.2: Q8.3@-44.183,15.164 -42.621,15.164 v1(-42.062,14.605) -40.678,13.221 R108.1@-40.678,11.354 ; v1(-36.741,11.671) Q10.1@-36.741,13.132
  Bottom Layer w0.2: v1(-42.062,14.605) -39.675,14.605 v1(-36.741,11.671)
NetQ6_3: Q6.3 Q10.3 | length 4.2
  Top Layer w1: Q6.3@-39.941,15.164 Q10.3@-35.776,15.164
NetQ7_1: Q7.1 R109.1 R111.1 | length 3.6
  Top Layer w0.2: R109.1@49.086,37.465 49.263,37.287 Q7.1@49.263,33.909
NetQ8_1: Q8.1 R110.1 R114.1 | length 3.6
  Top Layer w0.2: R110.1@-46.965,13.094 Q8.1@-45.186,13.094 ; Q8.1@-45.111,13.094 -44.971,12.954 R114.1@-44.971,11.354
NetR4_2: R4.2 R6.1 U1.3 | length 12.9
  Top Layer w0.2: R4.2@-36.665,-6.121 -38.215,-4.571 -38.215,-3.239 -37.617,-2.642 -35.281,-2.642 -34.696,-2.057 -34.696,-1.168 -32.614,0.914 U1.3@-31.085,0.914
NetR5_2: R5.2 U1.7 | length 5.5
  Top Layer w0.3: R5.2@-40.068,2.362 -39.497,2.362 -39.116,1.981 -39.116,0.025 -38.735,-0.356 U1.7@-36.885,-0.356
NetR53_2: R53.2 U6.28 | length 9.4
  Top Layer w0.2: U6.28@-36.517,25.684 -36.517,23.106 -34.29,20.879 -34.29,19.279 -34.011,18.999 R53.2@-32.296,18.999
NetR54_1: R54.1 U6.22 | length 8.6
  Top Layer w0.2: R54.1@-46.253,20.282 -46.253,20.549 -43.485,23.317 -40.665,23.317 -40.042,23.94 U6.22@-40.042,24.659
NetR55_1: R55.1 U6.24 | length 7.4
  Top Layer w0.2: R55.1@-43.459,20.282 -43.459,20.498 -42.062,21.895 -40.107,21.895 -39.042,22.959 U6.24@-39.042,24.659
NetR56_1: R56.1 U6.25 | length 7
  Top Layer w0.2: R56.1@-42.062,20.282 -42.062,21.057 -41.783,21.336 -39.751,21.336 -38.542,22.545 U6.25@-38.542,24.659
NetR57_1: R57.1 U6.35 | length 5
  Top Layer w0.2: U6.35@-36.517,29.184 -34.494,29.184 -32.614,31.064 R57.1@-32.296,31.064
NetR64_1: R64.1 U8.36 | length 9.5
  Top Layer w0.2: U8.36@45.133,14.996 45.133,8.588 46.725,6.996 R64.1@46.725,6.192
NetR65_1: R65.1 U8.37 | length 8.8
  Top Layer w0.2: U8.37@46.025,14.097 46.025,9.017 48.185,6.856 R65.1@48.185,6.192
NetR66_1: R66.1 U8.38 | length 9.8
  Top Layer w0.2: U8.38@46.425,14.097 46.425,9.252 48.26,7.417 49.251,7.417 49.645,7.022 R66.1@49.645,6.192
NetR67_1: R67.1 U8.39 | length 11
  Top Layer w0.2: U8.39@46.825,14.097 46.825,9.563 48.539,7.849 50.724,7.849 51.105,7.467 R67.1@51.105,6.192
NetR68_1: R68.1 U8.31 | length 6.6
  Top Layer w0.2: R68.1@39.652,14.408 40.748,14.408 43.336,16.996 U8.31@45.133,16.996
NetR69_1: R69.1 U8.30 | length 6.1
  Top Layer w0.2: R69.1@39.652,15.891 41.665,15.891 43.17,17.396 U8.30@45.133,17.396
NetR70_1: R70.1 U8.28 | length 5.8
  Top Layer w0.2: R70.1@39.627,18.849 41.349,18.849 42.002,18.196 U8.28@45.133,18.196
NetR71_1: R71.1 U8.27 | length 6.2
  Top Layer w0.2: R71.1@39.627,20.333 40.932,20.333 42.669,18.596 U8.27@45.133,18.596
NetR73_1: R73.1 U8.1 | length 14.4
  Top Layer w0.2: U8.1@51.336,14.996 52.362,13.97 v1(54.026,13.97) ; v1(56.794,13.97) 57.15,13.614 57.15,12.837 57.347,12.641 57.347,8.846 58.649,7.544 R73.1@58.649,6.192
  Bottom Layer w0.2: v1(54.026,13.97) v1(56.794,13.97)
NetR74_1: R74.1 U8.48 | length 13.4
  Top Layer w0.2: U8.48@50.425,14.097 51.009,13.513 52.68,13.513 53.213,12.979 v1(54,12.979) ; v1(56.617,12.522) 56.947,12.192 56.947,8.28 57.111,8.116 R74.1@57.111,6.192
  Bottom Layer w0.2: v1(54,12.979) 56.159,12.979 v1(56.617,12.522)
NetR75_1: R75.1 U8.34 | length 10.8
  Top Layer w0.2: R75.1@43.805,6.192 43.805,15.535 44.066,15.796 U8.34@45.133,15.796
NetR76_1: R76.1 U8.32 | length 7
  Top Layer w0.2: R76.1@39.652,12.908 39.883,12.908 43.571,16.596 U8.32@45.133,16.596
NetR77_1: R77.1 U8.33 | length 8.6
  Top Layer w0.2: R77.1@39.652,11.408 40.999,11.408 41.478,11.887 41.478,13.868 43.806,16.196 U8.33@45.133,16.196
NetR78_1: R78.1 U8.35 | length 10.4
  Top Layer w0.2: U8.35@45.133,15.396 44.428,15.396 44.272,15.24 44.272,7.62 45.265,6.627 R78.1@45.265,6.192
NetR80_1: R80.1 U8.40 | length 12.1
  Top Layer w0.2: U8.40@47.225,14.097 47.225,9.798 48.768,8.255 52.197,8.255 52.58,7.872 R80.1@52.58,6.192
NetR85_1: R85.1 U8.9 | length 9
  Top Layer w0.2: U8.9@51.336,18.196 52.968,18.196 54.407,19.634 54.407,20.625
  Top Layer w0.35: 54.407,20.625 54.407,24.904 R85.1@54.458,24.955
NetR100_1: R100.1 U11.37 | length 3.5
  Top Layer w0.2: U11.37@-64.853,26.079 -64.458,26.079 -63.779,25.4 R100.1@-61.608,25.4
NetR100_2: R100.2 X4.3 | length 4.7
  Top Layer w0.2: R100.2@-60.058,25.4 -60.058,25.133 -57.667,22.742 X4.3@-57.667,21.692
NetR103_2: R103.2 U11.13 | length 6
  Top Layer w0.2: R103.2@-73.533,36.944 -73.533,35.179 -72.103,33.749 U11.13@-72.103,31.579
NetR113_2: R113.2 U13.2 U13.3 | length 11.2
  Top Layer w0.2: R113.2@-72.898,-4.585 -72.898,-4.826 -71.12,-6.604 -71.12,-8.636 ; U13.2@-68.474,-10.033 -70.485,-10.033 -71.12,-9.398 -71.12,-8.636 ; U13.3@-68.474,-8.763 -70.993,-8.763 -71.12,-8.636
NetR116_2: R116.2 S2.2 | length 6.3
  Top Layer w0.2: R116.2@72.72,-51.803 72.885,-51.803 73.762,-52.68 73.762,-57.439 S2.2@73.889,-57.566
NetR118_2: R118.2 U14.8 | length 2
  Top Layer w0.2: U14.8@-74.274,-29.083 -74.155,-29.202 R118.2@-74.155,-30.988
PHY2_LED_1000N: R83.1 R95.2 U8.24 | length 12.5
  Top Layer w0.2: R83.1@35.649,23.317 35.653,23.314 R95.2@35.653,21.832 44.5,21.832 U8.24@46.035,20.297
PHY2_LED_ACTN: R82.1 R94.2 U8.23 | length 14.6
  Top Layer w0.2: R94.2@35.675,26.314 R82.1@35.675,24.816 38.215,22.276 45.288,22.276 46.435,21.129 U8.23@46.435,20.297
PWR_BUT: J1.17
PWR_EN: J15.6 P2.9 P3.9 P4.9 P6.9 P8.19 R61.2 R260.2 R261.1 | length 641.5
  Top Layer w0.2: P3.9@-87.63,42.29 -82.931,46.989 -82.931,57.531 -79.807,60.655 13.64,60.655 v1(14.148,60.147) 14.376,59.919 43.231,59.919 44.526,61.214 57.836,61.214 59.995,59.055 82.956,59.055 93.066,48.946 93.066,-52.578 92.304,-53.34 90.479,-53.34 P8.19@89.164,-52.025 88.472,-51.333 79.477,-51.333 71.145,-43.002 65.1,-43.002 63.729,-41.631 63.729,-30.099 71.501,-22.327 R61.2@71.501,-10.935 ; v1(6.045,-65.786) 6.045,-57.023 v1(8.687,-54.381) ; R260.2@7.62,49.39 7.721,49.39 9.22,50.889 9.22,55.422 P6.9@8.508,56.134 ; v1(8.687,-51.537) 8.687,-48.641 11.025,-46.303 J15.6@11.025,-44.925
  Bottom Layer w0.2: P4.9@-87.63,-45.34 -88.876,-44.094 -90.348,-44.094 -91.465,-45.212 -91.465,-54.229 -80.34,-65.354 6.045,-65.354 ; P2.9@-87.63,23.875 -87.63,24.867 -91.999,29.235 -91.999,42.926 -90.932,43.993 -89.333,43.993 P3.9@-87.63,42.29 ; v1(6.045,-65.786) 6.045,-65.354 ; P6.9@8.508,56.134 10.135,56.134 v1(14.148,60.147) ; v1(8.687,-54.381) v1(8.687,-51.537) ; P8.19@89.164,-52.025 89.164,-54.981 81.813,-62.332 73.584,-62.332 70.561,-65.354 6.045,-65.354
RGMII1_COL: J2.21
RGMII1_MDIO_CLK: J2.39 R73.2 | length 47.4
  Top Layer w0.2: J2.39@16.275,7.898 17.931,7.898 v1(18.593,8.56) ; v1(58.623,2.388) 58.623,4.616 R73.2@58.649,4.642
  Bottom Layer w0.2: v1(18.593,8.56) 19.66,7.493 40.31,7.493 45.415,2.388 v1(58.623,2.388)
RGMII1_MDIO_DATA: J2.41 R72.2 R74.2 | length 46.3
  Top Layer w0.2: J2.41@16.275,6.628 17.957,6.628 v1(18.567,7.239) ; v1(55.55,1.676) 55.55,4.618 R72.2@55.574,4.642 R74.2@57.111,4.642
  Bottom Layer w0.2: v1(18.567,7.239) 19.025,6.782 39.345,6.782 44.45,1.676 v1(55.55,1.676)
RGMII1_REFCLK: J2.17
RGMII1_RXCLK: J2.27 R77.2 R91.2 | length 38.9
  Top Layer w0.2: v1(13.106,7.341) 12.421,8.026 12.421,14.275 13.664,15.518 J2.27@16.275,15.518 ; v1(32.842,12.065) 34.786,12.065 R91.2@35.649,11.201 ; R91.2@35.653,11.382 R77.2@38.076,11.382
  Bottom Layer w0.2: v1(13.106,7.341) 13.818,7.341 18.542,12.065 v1(32.842,12.065)
RGMII1_RXD0: J2.37 R68.2 R90.2 | length 39.1
  Top Layer w0.2: v1(13.995,9.525) 14.352,9.168 J2.37@16.275,9.168 ; v1(31.852,15.392) 34.786,15.392 R90.2@35.649,14.529 ; R90.2@35.653,14.367 R68.2@38.062,14.367
  Bottom Layer w0.2: v1(13.995,9.525) 14.224,9.525 20.091,15.392 20.678,15.392 ccw(c20.678,15.617) 20.903,15.617 cw(c21.186,15.617) 21.186,15.9 21.327,15.9 cw(c21.327,15.617) 21.611,15.617 21.611,15.168 ccw(c21.894,15.168) 21.894,14.884 22.035,14.884 ccw(c22.035,15.168) 22.319,15.168 22.319,15.617 cw(c22.602,15.617) 22.602,15.9 22.743,15.9 cw(c22.743,15.617) 23.027,15.617 23.027,15.168 ccw(c23.31,15.168) 23.31,14.884 23.451,14.884 ccw(c23.451,15.168) 23.735,15.168 23.735,15.617 cw(c24.018,15.617) 24.018,15.9 24.159,15.9 cw(c24.159,15.617) 24.443,15.617 24.443,15.168 ccw(c24.726,15.168) 24.726,14.884 24.867,14.884 ccw(c24.867,15.168) 25.151,15.168 25.151,15.617 cw(c25.434,15.617) 25.434,15.9 25.575,15.9 cw(c25.575,15.617) 25.859,15.617 25.859,15.168 ccw(c26.142,15.168) 26.142,14.884 26.283,14.884 ccw(c26.283,15.168) 26.567,15.168 26.567,15.617 cw(c26.85,15.617) 26.85,15.9 26.991,15.9 cw(c26.991,15.617) 27.275,15.617 27.275,15.168 ccw(c27.558,15.168) 27.558,14.884 27.699,14.884 ccw(c27.699,15.168) 27.983,15.168 27.983,15.617 cw(c28.266,15.617) 28.266,15.9 28.407,15.9 cw(c28.407,15.617) 28.691,15.617 28.691,15.168 ccw(c28.974,15.168) 28.974,14.884 29.115,14.884 ccw(c29.115,15.168) 29.399,15.168 29.399,15.617 cw(c29.682,15.617) 29.682,15.9 29.823,15.9 cw(c29.823,15.617) 30.107,15.617 ccw(c30.331,15.617) 30.331,15.392 v1(31.852,15.392)
RGMII1_RXD1: J2.35 R69.2 R92.2 | length 39
  Top Layer w0.2: v1(14.071,10.438) J2.35@16.275,10.438 ; v1(31.852,17.221) 34.633,17.221 R92.2@35.649,16.205 ; R92.2@35.653,15.86 R69.2@38.071,15.86
  Bottom Layer w0.2: v1(14.071,10.438) 14.071,10.692 20.599,17.221 21.668,17.221 cw(c21.668,16.973) 21.915,16.973 21.915,16.961 ccw(c22.163,16.961) 22.163,16.713 22.376,16.713 ccw(c22.376,16.961) 22.623,16.961 22.623,17.481 cw(c22.871,17.481) 22.871,17.729 23.084,17.729 cw(c23.084,17.481) 23.331,17.481 23.331,16.961 ccw(c23.579,16.961) 23.579,16.713 23.792,16.713 ccw(c23.792,16.961) 24.039,16.961 24.039,17.481 cw(c24.287,17.481) 24.287,17.729 24.5,17.729 cw(c24.5,17.481) 24.747,17.481 24.747,16.961 ccw(c24.995,16.961) 24.995,16.713 25.208,16.713 ccw(c25.208,16.961) 25.455,16.961 25.455,17.481 cw(c25.703,17.481) 25.703,17.729 25.916,17.729 cw(c25.916,17.481) 26.163,17.481 26.163,16.961 ccw(c26.411,16.961) 26.411,16.713 26.624,16.713 ccw(c26.624,16.961) 26.871,16.961 26.871,17.481 cw(c27.119,17.481) 27.119,17.729 27.332,17.729 cw(c27.332,17.481) 27.579,17.481 27.579,16.961 ccw(c27.827,16.961) 27.827,16.713 28.04,16.713 ccw(c28.04,16.961) 28.287,16.961 28.287,17.481 cw(c28.535,17.481) 28.535,17.729 28.748,17.729 cw(c28.748,17.481) 28.995,17.481 28.995,16.961 ccw(c29.243,16.961) 29.243,16.713 29.456,16.713 ccw(c29.456,16.961) 29.703,16.961 29.703,17.481 cw(c29.951,17.481) 29.951,17.729 30.164,17.729 cw(c30.164,17.481) 30.411,17.481 30.411,17.469 ccw(c30.659,17.469) 30.659,17.221 v1(31.852,17.221)
RGMII1_RXD2: J2.33 R70.2 R89.2 | length 38.9
  Top Layer w0.2: v1(14.098,11.708) J2.33@16.275,11.708 ; v1(31.877,19.329) 34.836,19.329 R89.2@35.649,18.517 ; R89.2@35.655,18.849 R70.2@38.077,18.849
  Bottom Layer w0.2: v1(14.098,11.708) 14.098,11.99 21.438,19.329 22.556,19.329 cw(c22.556,19.105) 22.781,19.105 ccw(c23.064,19.105) 23.064,18.821 23.206,18.821 ccw(c23.206,19.105) 23.489,19.105 23.489,19.554 cw(c23.772,19.554) 23.772,19.837 23.914,19.837 cw(c23.914,19.554) 24.197,19.554 24.197,19.105 ccw(c24.48,19.105) 24.48,18.821 24.622,18.821 ccw(c24.622,19.105) 24.905,19.105 24.905,19.554 cw(c25.188,19.554) 25.188,19.837 25.33,19.837 cw(c25.33,19.554) 25.613,19.554 25.613,19.105 ccw(c25.896,19.105) 25.896,18.821 26.038,18.821 ccw(c26.038,19.105) 26.321,19.105 26.321,19.554 cw(c26.604,19.554) 26.604,19.837 26.746,19.837 cw(c26.746,19.554) 27.029,19.554 27.029,19.105 ccw(c27.312,19.105) 27.312,18.821 27.454,18.821 ccw(c27.454,19.105) 27.737,19.105 27.737,19.554 cw(c28.02,19.554) 28.02,19.837 28.162,19.837 cw(c28.162,19.554) 28.445,19.554 28.445,19.105 ccw(c28.728,19.105) 28.728,18.821 28.87,18.821 ccw(c28.87,19.105) 29.153,19.105 29.153,19.554 cw(c29.436,19.554) 29.436,19.837 29.578,19.837 cw(c29.578,19.554) 29.861,19.554 29.861,19.105 ccw(c30.144,19.105) 30.144,18.821 30.286,18.821 ccw(c30.286,19.105) 30.569,19.105 30.569,19.554 cw(c30.852,19.554) 30.852,19.837 30.994,19.837 cw(c30.994,19.554) 31.277,19.554 31.277,19.472 ccw(c31.42,19.472) 31.42,19.329 v1(31.877,19.329)
RGMII1_RXD3: J2.31 R71.2 R93.2 | length 38.9
  Top Layer w0.2: v1(14.147,12.978) J2.31@16.275,12.978 ; v1(31.902,21.006) 34.836,21.006 R93.2@35.649,20.193 ; R93.2@35.652,20.333 R71.2@38.077,20.333
  Bottom Layer w0.2: v1(14.147,12.978) 14.147,13.359 21.793,21.006 23.024,21.006 cw(c23.024,20.793) 23.236,20.793 23.236,20.71 ccw(c23.449,20.71) 23.449,20.498 23.732,20.498 ccw(c23.732,20.71) 23.944,20.71 23.944,21.301 cw(c24.157,21.301) 24.157,21.514 24.44,21.514 cw(c24.44,21.301) 24.652,21.301 24.652,20.71 ccw(c24.865,20.71) 24.865,20.498 25.148,20.498 ccw(c25.148,20.71) 25.36,20.71 25.36,21.301 cw(c25.573,21.301) 25.573,21.514 25.856,21.514 cw(c25.856,21.301) 26.068,21.301 26.068,20.71 ccw(c26.281,20.71) 26.281,20.498 26.564,20.498 ccw(c26.564,20.71) 26.776,20.71 26.776,21.301 cw(c26.989,21.301) 26.989,21.514 27.272,21.514 cw(c27.272,21.301) 27.484,21.301 27.484,20.71 ccw(c27.697,20.71) 27.697,20.498 27.98,20.498 ccw(c27.98,20.71) 28.192,20.71 28.192,21.301 cw(c28.405,21.301) 28.405,21.514 28.688,21.514 cw(c28.688,21.301) 28.9,21.301 28.9,20.71 ccw(c29.113,20.71) 29.113,20.498 29.396,20.498 ccw(c29.396,20.71) 29.608,20.71 29.608,21.301 cw(c29.821,21.301) 29.821,21.514 30.104,21.514 cw(c30.104,21.301) 30.316,21.301 30.316,20.71 ccw(c30.529,20.71) 30.529,20.498 30.812,20.498 ccw(c30.812,20.71) 31.024,20.71 31.024,20.793 cw(c31.237,20.793) 31.237,21.006 v1(31.902,21.006)
RGMII1_RXDV: J2.29 R76.2 R88.2 | length 38.8
  Top Layer w0.2: v1(13.64,8.255) 13.106,8.788 13.106,13.538 13.817,14.248 J2.29@16.275,14.248 ; v1(31.852,13.716) 34.811,13.716 R88.2@35.653,12.874 R76.2@38.069,12.874
  Bottom Layer w0.2: v1(13.64,8.255) 19.101,13.716 20.535,13.716 ccw(c20.535,13.905) 20.725,13.905 cw(c21.043,13.905) 21.043,14.224 21.114,14.224 cw(c21.114,13.905) 21.433,13.905 21.433,13.527 ccw(c21.751,13.527) 21.751,13.208 21.822,13.208 ccw(c21.822,13.527) 22.141,13.527 22.141,13.905 cw(c22.459,13.905) 22.459,14.224 22.53,14.224 cw(c22.53,13.905) 22.849,13.905 22.849,13.527 ccw(c23.167,13.527) 23.167,13.208 23.238,13.208 ccw(c23.238,13.527) 23.557,13.527 cw(c23.746,13.527) 23.746,13.716 v1(31.852,13.716)
RGMII1_TXCLK: J2.18 R78.2 | length 40.2
  Top Layer w0.2: J2.18@20.825,21.865 24.439,21.865 24.676,21.628 24.751,21.553 ccw(c24.926,21.728) 25.102,21.553 25.29,21.741 cw(c25.465,21.566) 25.64,21.741 25.791,21.591 cw(c25.615,21.416) 25.791,21.241 25.427,20.877 25.063,20.514 ccw(c25.239,20.338) 25.063,20.163 25.214,20.013 ccw(c25.389,20.188) 25.564,20.013 25.928,20.377 26.291,20.74 cw(c26.466,20.565) 26.642,20.74 26.792,20.59 cw(c26.617,20.415) 26.792,20.239 26.428,19.876 26.065,19.512 ccw(c26.24,19.337) 26.065,19.162 26.215,19.012 ccw(c26.39,19.187) 26.565,19.012 26.754,19.2 cw(c26.929,19.025) 27.104,19.2 27.178,19.126 28.499,17.805 28.499,13.767 34.874,7.391 38.633,7.391 42.443,3.581 44.806,3.581 45.265,4.041 R78.2@45.265,4.642
RGMII1_TXD0: J2.20 R64.2 | length 40.7
  Top Layer w0.2: J2.20@20.825,20.595 23.347,20.595 27.457,16.485 27.457,13.005 27.648,12.814 27.748,12.714 ccw(c27.898,12.864) 28.048,12.714 28.107,12.773 cw(c28.257,12.623) 28.408,12.773 28.608,12.573 cw(c28.458,12.423) 28.608,12.272 28.399,12.063 28.19,11.854 ccw(c28.34,11.704) 28.19,11.554 28.39,11.354 ccw(c28.54,11.504) 28.69,11.354 28.899,11.563 29.108,11.772 cw(c29.259,11.622) 29.409,11.772 29.609,11.571 cw(c29.459,11.421) 29.609,11.271 29.4,11.062 29.191,10.853 ccw(c29.341,10.703) 29.191,10.553 29.391,10.352 ccw(c29.542,10.503) 29.692,10.352 29.901,10.561 30.11,10.77 cw(c30.26,10.62) 30.41,10.77 30.61,10.57 cw(c30.46,10.42) 30.61,10.27 30.552,10.211 ccw(c30.702,10.061) 30.552,9.911 30.772,9.69 33.63,6.833 38.379,6.833 42.24,2.972 46.33,2.972 46.725,3.368 R64.2@46.725,4.642
RGMII1_TXD1: J2.22 R65.2 | length 40.6
  Top Layer w0.2: J2.22@20.825,19.325 23.042,19.325 23.254,19.113 23.354,19.013 ccw(c23.504,19.164) 23.654,19.013 23.713,19.072 cw(c23.863,18.922) 24.013,19.072 24.214,18.872 cw(c24.063,18.722) 24.214,18.572 24.005,18.363 23.796,18.154 ccw(c23.946,18.003) 23.796,17.853 23.996,17.653 ccw(c24.146,17.803) 24.296,17.653 24.505,17.862 24.714,18.071 cw(c24.864,17.921) 25.015,18.071 25.215,17.871 cw(c25.065,17.721) 25.215,17.57 25.156,17.511 ccw(c25.306,17.361) 25.156,17.211 25.197,17.17 26.327,16.04 26.327,12.611 32.69,6.248 38.151,6.248 41.986,2.413 47.574,2.413 48.185,3.024 R65.2@48.185,4.642
RGMII1_TXD2: J2.24 R66.2 | length 40.4
  Top Layer w0.2: J2.24@20.825,18.055 22.509,18.055 22.758,17.805 23.009,17.555 23.013,17.559 cw(c23.188,17.384) 23.364,17.559 23.514,17.409 cw(c23.339,17.234) 23.514,17.059 23.509,17.054 23.505,17.05 ccw(c23.68,16.875) 23.505,16.7 23.655,16.549 ccw(c23.83,16.725) 24.006,16.549 24.01,16.554 24.014,16.558 cw(c24.19,16.383) 24.365,16.558 24.515,16.408 cw(c24.34,16.233) 24.515,16.058 24.511,16.053 25.011,15.553 25.146,15.418 25.146,15.064 ; 25.146,15.215 25.146,12.929 32.436,5.639 37.998,5.639 41.707,1.93 49.073,1.93 49.645,2.503 R66.2@49.645,4.642
RGMII1_TXD3: J2.26 R67.2 | length 41
  Top Layer w0.2: J2.26@20.825,16.785 22.788,16.785 24.536,15.037 24.536,12.903 32.36,5.08 37.897,5.08 41.681,1.295 50.521,1.295 51.105,1.88 R67.2@51.105,4.642
RGMII1_TXEN: J2.16 R75.2 | length 40.5
  Top Layer w0.2: J2.16@20.825,23.135 26.319,23.135 26.619,22.835 26.694,22.76 ccw(c26.87,22.935) 27.045,22.76 27.233,22.948 cw(c27.408,22.773) 27.584,22.948 27.734,22.798 cw(c27.559,22.622) 27.734,22.447 27.37,22.084 27.007,21.72 ccw(c27.182,21.545) 27.007,21.37 27.157,21.219 ccw(c27.332,21.395) 27.507,21.219 27.871,21.583 28.234,21.947 cw(c28.41,21.771) 28.585,21.947 28.735,21.796 cw(c28.56,21.621) 28.735,21.446 28.371,21.082 28.008,20.719 ccw(c28.183,20.544) 28.008,20.368 28.158,20.218 ccw(c28.333,20.393) 28.508,20.218 28.697,20.407 cw(c28.872,20.231) 29.047,20.407 29.373,20.081 29.426,20.028 29.604,19.85 29.604,19.101 29.604,18.995 ccw(c29.852,18.995) 29.852,18.747 29.864,18.747 cw(c29.864,18.499) 30.112,18.499 30.112,18.287 cw(c29.864,18.287) 29.864,18.039 29.604,18.039 29.344,18.039 ccw(c29.344,17.791) 29.096,17.791 29.096,17.579 ccw(c29.344,17.579) 29.344,17.331 29.356,17.331 cw(c29.356,17.083) 29.604,17.083 29.604,16.942 29.604,13.932 35.484,8.052 38.837,8.052 42.247,4.642 R75.2@43.805,4.642